# Altium PCB esp32.PcbDoc (part 1 of 2)
Units mil, origin at the board's own origin, x right, y up, seen from the top; angles counter-clockwise.
Board outline 804.97 x 1919.97 mil, 4 copper layers (Top Layer, VCC, GND, Bottom Layer), stack 51.1 mil thick; 76 components, 91 nets, 311 pads, 308 vias.
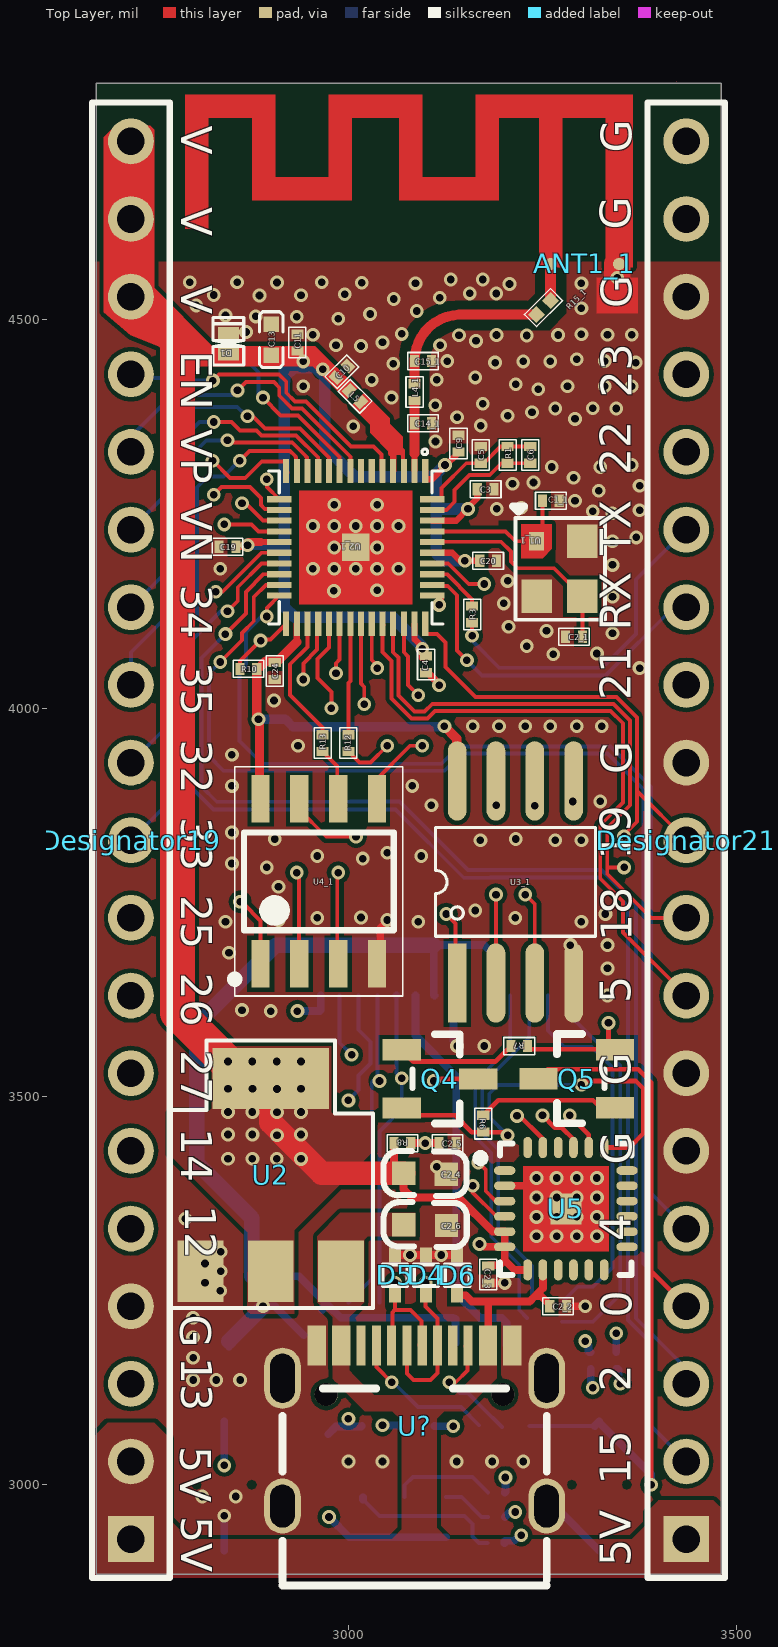
[diagram p0: Top Layer view]
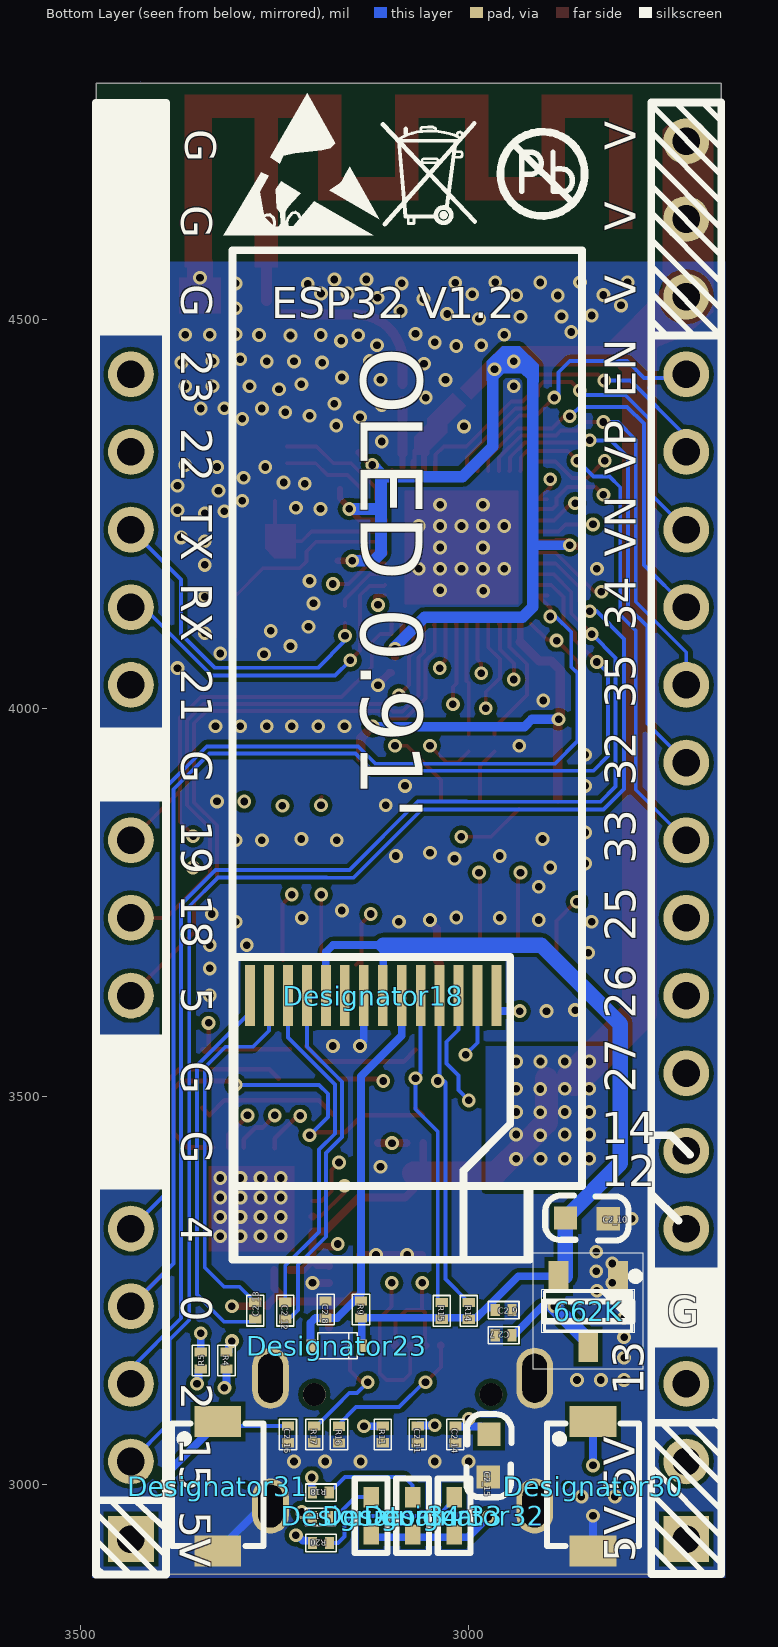
[diagram p1: Bottom Layer view, seen from below]
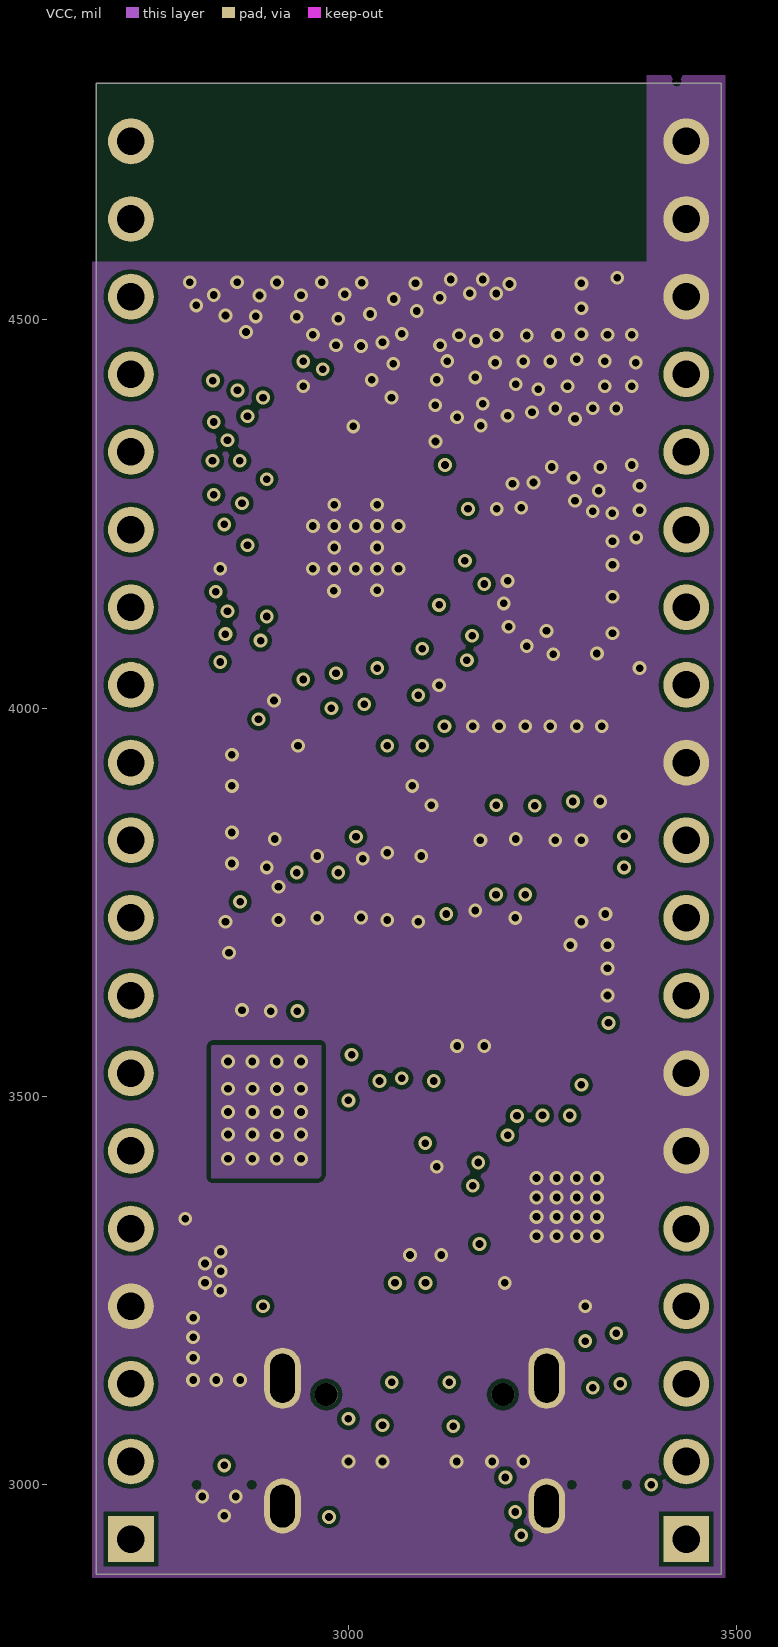
[diagram p2: VCC]
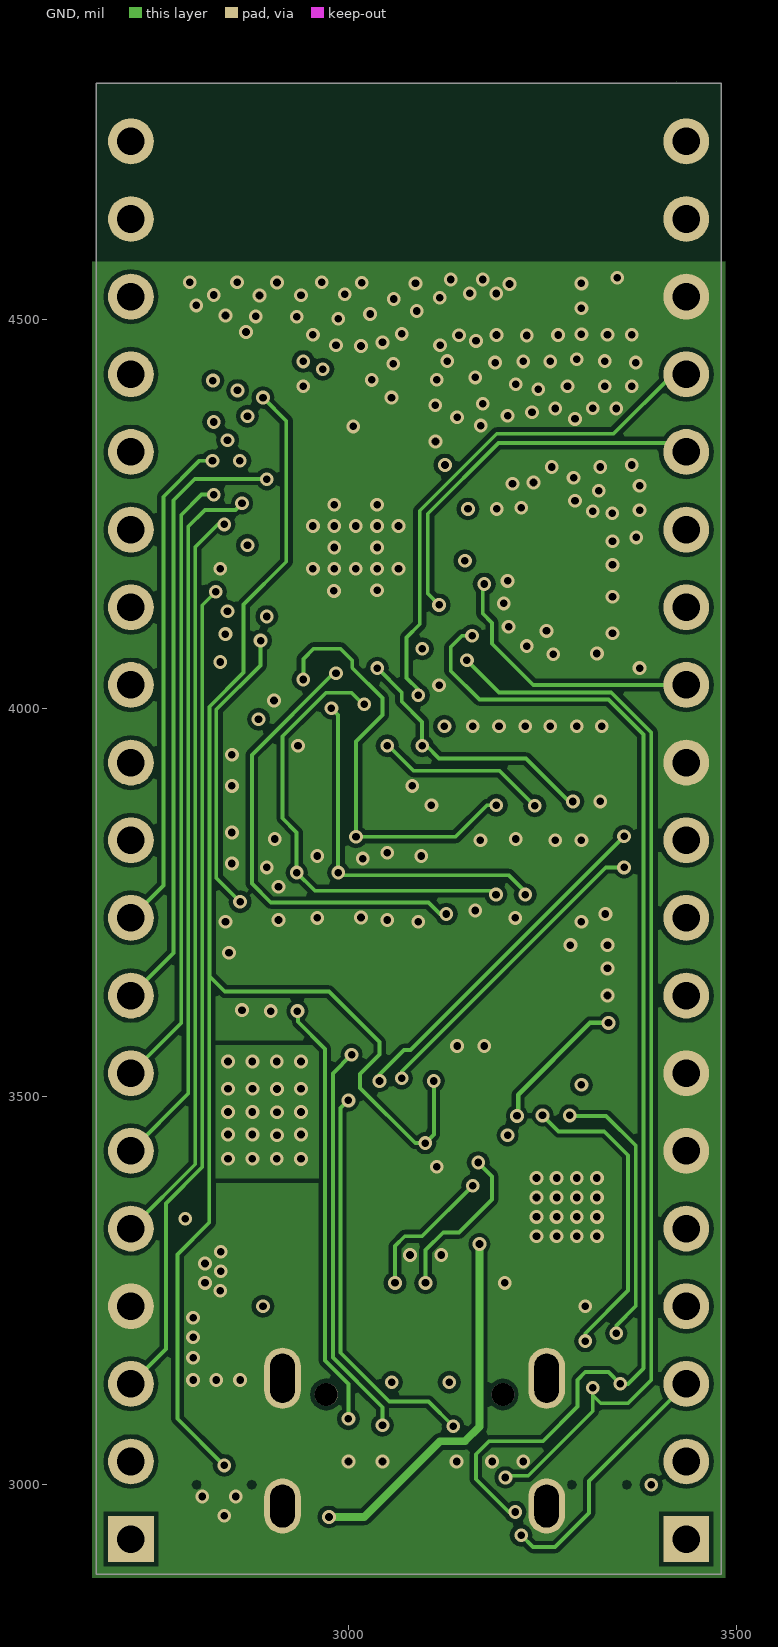
[diagram p3: GND]

## Layer stack, top to bottom
Top Solder: solder mask 0.4, Solder Resist, Dk 3.5
Top Layer: signal copper 1.3778
Dielectric 2: prepreg 4.2, PP-014, Dk 4.2
VCC: signal copper 0.4724
Dielectric 1: core 39, Core-042, Dk 4.6
GND: signal copper 0.4724
Dielectric 3: prepreg 4.2, PP-014, Dk 4.2
Bottom Layer: signal copper 1.3778
Bottom Solder: solder mask 0.4, Solder Resist, Dk 3.5

## Board outline
2675.01,2885.01 2675.01,4804.98 3479.99,4804.98 3479.99,2885.01

## Design rules (kind name [scope] priority, off if disabled: settings)
Clearance [All] p1: gap=5.5 ignorepadtopadclearanceinfootprint=FALSE except(4: Arc-Arc Arc-Track Track-Track)
ComponentClearance [All] p1: gap=0 collisioncheckmode=3 verticalgap=0 showdistances=FALSE
DiffPairsRouting [All] p1: maxlimit=10 minlimit=4 mostfreqgap=10 toplayer_minwidth=4 toplayer_maxwidth=15 toplayer_prefwidth=15 midlayer1_minwidth=4 midlayer1_maxwidth=15 midlayer1_prefwidth=15 midlayer2_minwidth=4 midlayer2_maxwidth=15 midlayer2_prefwidth=15 bottomlayer_minwidth=4 bottomlayer_maxwidth=15 bottomlayer_prefwidth=15 maxuncoupledlength=500
HoleSize [All] p1: absolutevalues=TRUE maxlimit=248.03 minlimit=7.87 maxpercent=80.000 minpercent=20.000
MinimumAnnularRing [All] p1: minimumring=4
PolygonConnect alll [All vs IsNamedPolygon('+5V_L01_P002') Or  IsNamedPolygon('GND-VDD33') Or  IsNamedPolygon('Top Layer-GND') Or  IsNamedPolygon('Bottom Layer-VDD33') Or  IsNamedPolygon('Top Layer-VDD33') Or  IsNamedPolygon('GND-GND') Or  IsNamedPolygon('VDD33_L02_P008') Or  IsNamedPolygon('Bottom Layer-GND') Or  IsNamedPolygon('VCC-GND')] p1: connectstyle=Direct reliefconductorwidth=10 reliefentries=4 polygonreliefangle="90 Angle" airgapwidth=10
PolygonConnect vdd3333 [All vs IsNamedPolygon('VDD33_L02_P008')] p2: connectstyle=Direct reliefconductorwidth=10 reliefentries=4 polygonreliefangle="90 Angle" airgapwidth=10
PolygonConnect all [All vs IsNamedPolygon('Top Layer-VDD33') Or  IsNamedPolygon('+5V_L01_P002') Or  IsNamedPolygon('Top Layer-GND') Or  IsNamedPolygon('Bottom Layer-VDD33') Or  IsNamedPolygon('VDD33_L02_P008') Or  IsNamedPolygon('VCC-GND') Or  IsNamedPolygon('GND-VDD33') Or  IsNamedPolygon('GND-GND') Or  IsNamedPolygon('Bottom Layer-GND')] p3: connectstyle=Direct reliefconductorwidth=10 reliefentries=4 polygonreliefangle="90 Angle" airgapwidth=10
PolygonConnect +5v_1 [All vs IsNamedPolygon('Bottom Layer-+5V')] p4: connectstyle=Direct reliefconductorwidth=10 reliefentries=4 polygonreliefangle="90 Angle" airgapwidth=10
PolygonConnect botton [All vs IsNamedPolygon('Bottom Layer-GND')] p5: thpad.connectstyle=Relief thpad.reliefconductorwidth=10 thpad.reliefentries=4 thpad.polygonreliefangle="90 Angle" thpad.airgapwidth=10 smdpad.connectstyle=Relief smdpad.reliefconductorwidth=10 smdpad.reliefentries=4 smdpad.polygonreliefangle="90 Angle" smdpad.airgapwidth=10 via.connectstyle=Direct via.reliefconductorwidth=10 via.reliefentries=4 via.polygonreliefangle="90 Angle" via.airgapwidth=10
PolygonConnect vdd_3 [All vs IsNamedPolygon('VDD33_L02_P008')] p6: thpad.connectstyle=Relief thpad.reliefconductorwidth=10 thpad.reliefentries=4 thpad.polygonreliefangle="90 Angle" thpad.airgapwidth=10 smdpad.connectstyle=Relief smdpad.reliefconductorwidth=10 smdpad.reliefentries=4 smdpad.polygonreliefangle="90 Angle" smdpad.airgapwidth=10 via.connectstyle=Direct via.reliefconductorwidth=10 via.reliefentries=4 via.polygonreliefangle="90 Angle" via.airgapwidth=10
PolygonConnect vdd_2 [All vs IsNamedPolygon('VDD33_L02_P018')] p7: thpad.connectstyle=Relief thpad.reliefconductorwidth=10 thpad.reliefentries=4 thpad.polygonreliefangle="90 Angle" thpad.airgapwidth=10 smdpad.connectstyle=Relief smdpad.reliefconductorwidth=10 smdpad.reliefentries=4 smdpad.polygonreliefangle="90 Angle" smdpad.airgapwidth=10 via.connectstyle=Direct via.reliefconductorwidth=10 via.reliefentries=4 via.polygonreliefangle="90 Angle" via.airgapwidth=10
PolygonConnect gndvdd33 [All vs IsNamedPolygon('VDD33_L02_P018')] p8: thpad.connectstyle=Relief thpad.reliefconductorwidth=10 thpad.reliefentries=4 thpad.polygonreliefangle="90 Angle" thpad.airgapwidth=10 smdpad.connectstyle=Relief smdpad.reliefconductorwidth=10 smdpad.reliefentries=4 smdpad.polygonreliefangle="90 Angle" smdpad.airgapwidth=10 via.connectstyle=Direct via.reliefconductorwidth=10 via.reliefentries=4 via.polygonreliefangle="90 Angle" via.airgapwidth=10
PolygonConnect "gnd ndd33" [All vs IsNamedPolygon('VDD33_L02_P018')] p9: thpad.connectstyle=Relief thpad.reliefconductorwidth=10 thpad.reliefentries=4 thpad.polygonreliefangle="90 Angle" thpad.airgapwidth=10 smdpad.connectstyle=Relief smdpad.reliefconductorwidth=10 smdpad.reliefentries=4 smdpad.polygonreliefangle="90 Angle" smdpad.airgapwidth=10 via.connectstyle=Direct via.reliefconductorwidth=10 via.reliefentries=4 via.polygonreliefangle="90 Angle" via.airgapwidth=10
PolygonConnect singnd [All vs IsNamedPolygon('GND-GND')] p10: thpad.connectstyle=Relief thpad.reliefconductorwidth=10 thpad.reliefentries=4 thpad.polygonreliefangle="90 Angle" thpad.airgapwidth=10 smdpad.connectstyle=Relief smdpad.reliefconductorwidth=10 smdpad.reliefentries=4 smdpad.polygonreliefangle="90 Angle" smdpad.airgapwidth=10 via.connectstyle=Direct via.reliefconductorwidth=10 via.reliefentries=4 via.polygonreliefangle="90 Angle" via.airgapwidth=10
PolygonConnect gnd [All vs IsNamedPolygon('VCC-GND')] p11: thpad.connectstyle=Relief thpad.reliefconductorwidth=10 thpad.reliefentries=4 thpad.polygonreliefangle="90 Angle" thpad.airgapwidth=10 smdpad.connectstyle=Relief smdpad.reliefconductorwidth=10 smdpad.reliefentries=4 smdpad.polygonreliefangle="90 Angle" smdpad.airgapwidth=10 via.connectstyle=Direct via.reliefconductorwidth=10 via.reliefentries=4 via.polygonreliefangle="90 Angle" via.airgapwidth=10
PolygonConnect vdd_1 [All vs IsNamedPolygon('Bottom Layer-VDD33')] p12: thpad.connectstyle=Relief thpad.reliefconductorwidth=10 thpad.reliefentries=4 thpad.polygonreliefangle="90 Angle" thpad.airgapwidth=10 smdpad.connectstyle=Relief smdpad.reliefconductorwidth=10 smdpad.reliefentries=4 smdpad.polygonreliefangle="90 Angle" smdpad.airgapwidth=10 via.connectstyle=Direct via.reliefconductorwidth=10 via.reliefentries=4 via.polygonreliefangle="90 Angle" via.airgapwidth=10
PolygonConnect topgnd [All vs IsNamedPolygon('Top Layer-GND')] p13: thpad.connectstyle=Relief thpad.reliefconductorwidth=10 thpad.reliefentries=4 thpad.polygonreliefangle="90 Angle" thpad.airgapwidth=10 smdpad.connectstyle=Relief smdpad.reliefconductorwidth=10 smdpad.reliefentries=4 smdpad.polygonreliefangle="90 Angle" smdpad.airgapwidth=10 via.connectstyle=Direct via.reliefconductorwidth=10 via.reliefentries=4 via.polygonreliefangle="90 Angle" via.airgapwidth=10
PolygonConnect vdd33 [All vs IsNamedPolygon('Top Layer-VDD33')] p14: connectstyle=Direct reliefconductorwidth=10 reliefentries=4 polygonreliefangle="90 Angle" airgapwidth=10
PolygonConnect +5v [All vs IsNamedPolygon('+5V_L01_P002')] p15: thpad.connectstyle=Direct thpad.reliefconductorwidth=10 thpad.reliefentries=4 thpad.polygonreliefangle="90 Angle" thpad.airgapwidth=10 smdpad.connectstyle=Direct smdpad.reliefconductorwidth=10 smdpad.reliefentries=4 smdpad.polygonreliefangle="90 Angle" smdpad.airgapwidth=10 via.connectstyle=Relief via.reliefconductorwidth=10 via.reliefentries=4 via.polygonreliefangle="90 Angle" via.airgapwidth=10
PolygonConnect asm_1 [All vs IsNamedPolygon('Top Layer-VDD33')] p16: thpad.connectstyle=Direct thpad.reliefconductorwidth=10 thpad.reliefentries=4 thpad.polygonreliefangle="90 Angle" thpad.airgapwidth=10 smdpad.connectstyle=Direct smdpad.reliefconductorwidth=10 smdpad.reliefentries=4 smdpad.polygonreliefangle="90 Angle" smdpad.airgapwidth=10 via.connectstyle=Relief via.reliefconductorwidth=10 via.reliefentries=4 via.polygonreliefangle="90 Angle" via.airgapwidth=10
PolygonConnect asm [All vs IsNamedPolygon('Top Layer-VDD33')] p17: connectstyle=Relief reliefconductorwidth=10 reliefentries=4 polygonreliefangle="90 Angle" airgapwidth=10
PolygonConnect [All] p18: connectstyle=Relief reliefconductorwidth=10 reliefentries=4 polygonreliefangle="90 Angle" airgapwidth=10
RoutingVias [All] p1: holewidth=28 width=50 viastyle="Through Hole" minholewidth=8 minwidth=17.72 maxholewidth=50 maxwidth=80
SolderMaskExpansion [All] p1: expansion=4
Width [All] p1: maxlimit=50 minlimit=4 preferedwidth=10
27 further rules are at their usual default settings.

## Components (designator, comment, footprint, x,y, rotation, side; value= is the part's Value field where it differs from the comment)
662K "SOT-23-3" SOT-23-3 2846.22,3223.35 r270 bottom
ANT1_1 "MINI_ANT_TYPEB" MINI_ANT_TYPEB 3260.56,4572.06 r0 top
C1_1 "C0201" C0201 3260.58,4267.06 r0 top
C2_1 "C0201" C0201 3290.56,4092.06 r180 top
C2_2 "100nf" C0201 3270,3230 r180 top
C2_3 "100nf" C0201 3180,3270.83 r90 top
C2_4 "4.7uf" 0603C 3126.31,3399.65 r180 top
C2_5 "1uf" C0201 3127.64,3440 r180 top
C2_6 "4.7uf" 0603C 3126.61,3333.65 r180 top
C2_7 "1uf" C0201 2955,3192.69 r180 bottom
C2_8 "1uf" C0201 3184.35,3225.71 r90 bottom
C2_9 "100nf" C0201 2955,3225 r0 bottom
C2_10 "4.7uf" 0603C 2820.35,3342.12 r0 bottom
C2_11 "2.2uf" C0201 3065.7,3065 r90 bottom
C2_12 "1uf" C0201 3236.4,3224.17 r90 bottom
C2_13 "1uf" C0201 3275,3224.17 r270 bottom
C2_14 "100nf" C0201 3017.22,3065 r90 bottom
C2_15 "4.7uf" 0603C 2975.35,3009.79 r90 bottom
C2_16 "2.2uf" C0201 3232.85,3065 r90 bottom
C3 "100pf" C0201 3176.81,4282.06 r0 top
C4 "0.1uf" C0201 3100,4056.56 r270 top
C5 "10nf/6,3v 10%" C0201 3170.56,4326.31 r90 top
C6 "3.3nf/6.3v 10%" C0201 3234.31,4326.31 r90 top
C9 "0.1uf" C0201 3141.81,4340.81 r90 top
C10 "0.1uf" C0201 2991.67,4433.31 r45 top
C11 "1uf" C0201 2934.31,4470.81 r90 top
C13 "10uf" C0402 2900.56,4474.56 r90 top
C14_1 "C0201" C0201 3096.01,4367.06 r180 top
C15_1 "C0201" C0201 3096.01,4447.06 r180 top
C19 "0.1uf" C0201 2844.31,4207.81 r180 top
C20 "1uf" C0201 3180,4190 r0 top
C24 "1uf" C0201 2905,4047.88 r270 top
D1 "LESD8D3.3CAT5G" SOD882 2845.56,4469.56 r90 top
D4 "SOD-523" SOD-523#1 3100,3270 r90 top
D5 "SOD-523" SOD-523#1 3060,3270 r90 top
D6 "SOD-523" SOD-523#1 3140,3270 r90 top
Designator18 "Comment" OLED0.91 3079.34,3939.72 r270 bottom
Designator19 "Comment" "Pin HDR1X19/2.54mm-S" 2720,2930 r90 top
Designator21 "Comment" "Pin HDR1X19/2.54mm-S" 3435,2930 r90 top
Designator23 "1N4148" SOD-523#2 3194.77,3195.91 r180 bottom
Designator30 "Comment" SMT_SW_PTS_820 2840,3000 r270 bottom
Designator31 "Comment" SMT_SW_PTS_820 3323.14,3000 r270 bottom
Designator32 "Comment" 0402R 3018.82,2936.08 r90 bottom
Designator33 "Comment" 0402R 3072.39,2936.08 r90 bottom
Designator34 "Comment" 0402R 3125.72,2936.08 r90 bottom
L4_1 "L0201" L0201 3085.18,4407.06 r90 top
L5 "2.0nH" L0201 3008.56,4401.65 r135 top
Q4 "S8050" SOT-23(SOT-23-3) 3117.87,3522.6 r270 top
Q5 "S8050" SOT-23(SOT-23-3) 3294.14,3523.03 r90 top (schematic designator Q4)
R1 "20k 5%" R0201 3205,4326.31 r90 top
R3 "499ohm" R0201 3159.31,4120.81 r270 top
R4 "33r" R0201 3312,3160 r90 bottom
R5 "33r" R0201 3345,3160 r270 bottom
R6 "33r" R0201 3173.76,3465 r90 top
R7 "33r" R0201 3220,3565 r0 top
R8 "10k" R0201 3069.51,3440 r0 top
R9 "4.7k" R0201 3138.79,3225.71 r90 bottom
R10 "10k" R0201 2871.17,4050.68 r180 top
R11 "560k" R0201 3110.8,3065 r90 bottom
R12 "0" R0201 3000,3955 r270 top
R13 "0" R0201 2966.81,3955 r270 top
R14 "4.7k" R0201 3000,3224.06 r90 bottom
R15 "4.7k" R0201 3034.69,3224.06 r90 bottom
R15_1 "R0201A" R0201A 3251.21,4515.91 r45 top
R16 "5.1k" R0201 3167.07,3064.59 r90 bottom
R17 "5.1k" R0201 3198.96,3065 r90 bottom
R18 "4.7k" R0201 3190.43,2990 r180 bottom
R19 "4.7k" R0201 3190.71,2958.58 r180 bottom
R20 "4.7k" R0201 3190.33,2925 r180 bottom
U1_1 "3225" 3225 3242.31,4215.08 r270 top
U2 "SOT-223" SOT-223 2900,3275 r0 top
U2_1 "QFN48EB_0P35_5" QFN48EB_0P35_5 3009.39,4207.06 r270 top
U3_1 "SOIC08-WN" SOIC08-WN 3215,3776.31 r0 top
U4_1 "SOIC-8P" SOIC-8P 2961.87,3777.06 r90 top
U5 "CP2104-F03-GM" QFN-24_L4.0-W4.0-P0.50-BL-EP2.8 3280,3355.5 r270 top
U? "USB-C_SMD-TYPE-C-31-M-12" USB-C_SMD-TYPE-C-31-M-12 3085.18,3035 r0 top

## Footprints (in the part's own frame and the unit in brackets; to place one, negate y for a bottom-side part, rotate by r counter-clockwise, add the part's x,y. Pads: shape width x height; smd on the part's side, far side on the other; paste and mask are expansions set on the pad)
0402R [mil]
  rect 26x20 smd: 1(0,0) 2(48,0)
  silkscreen extent -24,-21 72,21, body extent 4,-10 43,10, height 13
0603C [mil]
  rect 30x30 smd: 1(0.21,-0.35) 2(55.21,-1.35)
  silkscreen extent -26,-30 81,28, body extent -1,-15 62,17, height 12
3225 [mm]
  rect 0.6x0.5 smd: 1(0,0)
  rect 1.1x1 smd: 2(1.8,0) 3(1.8,1.5) 4(0,1.5)
  Top Layer region: -0.55,0.5 -0.55,-0.5 0.55,-0.5 0.55,0.2 0.25,0.5 -0.55,0.5
  silkscreen extent -1.14,-0.77 2.57,2.23
C0201 [mm]
  rect 0.3x0.4 smd: 1(-0.275,0) 2(0.275,0)
  silkscreen extent -0.5,-0.28 0.5,0.28
C0402 [mil]
  rect 20x20 smd: 1(-20,0) 2(20,0)
  silkscreen extent -36,-15 36,15
L0201 [mm]
  rect 0.3x0.4 smd: 1(-0.275,0) 2(0.275,0)
  silkscreen extent -0.5,-0.28 0.5,0.28
MINI_ANT_TYPEB [mm]
  round 0.4 smd paste-0.2: 1(0,0) 2(2.237,0)
  Top Layer region: -0.377,-0.114 0.377,-0.114 0.377,4.786 1.796,4.786 1.796,-0.114 2.677,-0.114 2.677,5.54 -2.45,5.54 -2.45,2.84 -4.207,2.84 -4.207,5.54 -7.261,5.54 -7.261,2.84 -9.007,2.84 -9.007,5.54 -11.961,5.54 -11.961,1.161 -11.207,1.161 -11.207,4.786 -9.761,4.786 -9.761,2.086 -6.507,2.086 -6.507,4.786 -4.961,4.786 -4.961,2.086 -1.696,2.086 -1.696,4.786 -0.377,4.786 -0.377,-0.114
OLED0.91 [mm]
  rect 2x0.32 smd: 1(7.867,-5.139) 2(7.867,-4.519) 3(7.867,-3.899) 4(7.867,-3.279) 5(7.867,-2.659) 6(7.867,-2.039) 7(7.867,-1.419) 8(7.867,-0.799) 9(7.867,-0.179) 10(7.867,0.441) 11(7.867,1.061) 12(7.867,1.681) 13(7.867,2.301) 14(7.867,2.921)
  silkscreen extent -16.51,-5.72 16.51,5.72
"Pin HDR1X19/2.54mm-S" [mm] "Connector; Header; 19 Position"
  rect 1.5x1.5 hole 0.9: 1(0,0)
  round 1.5 hole 0.9: 2(2.54,0) 3(5.08,0) 4(7.62,0) 5(10.16,0) 6(12.7,0) 7(15.24,0) 8(17.78,0) 9(20.32,0) 10(22.86,0) 11(25.4,0) 12(27.94,0) 13(30.48,0) 14(33.02,0) 15(35.56,0) 16(38.1,0) 17(40.64,0) 18(43.18,0) 19(45.72,0)
  silkscreen extent -1.27,-1.27 46.99,1.27, body extent -1.27,-1.27 46.99,1.27, height 7.58
QFN48EB_0P35_5 [mm]
  rect 0.8x0.2 smd: 1(-2.5,2.275) 2(-2.5,1.925) 3(-2.5,1.575) 4(-2.5,1.225) 5(-2.5,0.875) 6(-2.5,0.525) 7(-2.5,0.175) 8(-2.5,-0.175) 9(-2.5,-0.525) 10(-2.5,-0.875) 11(-2.5,-1.225) 12(-2.5,-1.575) 13(-2.5,-1.925) 14(-2.5,-2.275) 25(2.5,-2.275) 26(2.5,-1.925) 27(2.5,-1.575) 28(2.5,-1.225) 29(2.5,-0.875) 30(2.5,-0.525) 31(2.5,-0.175) 32(2.5,0.175) 33(2.5,0.525) 34(2.5,0.875) 35(2.5,1.225) 36(2.5,1.575) 37(2.5,1.925) 38(2.5,2.275)
  rect 0.2x0.8 smd: 15(-1.575,-2.5) 16(-1.225,-2.5) 17(-0.875,-2.5) 18(-0.525,-2.5) 19(-0.175,-2.5) 20(0.175,-2.5) 21(0.525,-2.5) 22(0.875,-2.5) 23(1.225,-2.5) 24(1.575,-2.5) 39(1.575,2.5) 40(1.225,2.5) 41(0.875,2.5) 42(0.525,2.5) 43(0.175,2.5) 44(-0.175,2.5) 45(-0.525,2.5) 46(-0.875,2.5) 47(-1.225,2.5) 48(-1.575,2.5)
  rect 0.9x0.9 smd: 49(0,0)
  Top Layer region: -1.85,1.85 1.85,1.85 1.85,-1.85 -1.85,-1.85
  Top Layer region: -1.845,-0.95 -0.945,-0.95 -0.945,-1.85 -1.845,-1.85 -1.845,-0.95
  Top Layer region: 0.955,-0.95 1.85,-0.95 1.85,-1.85 0.955,-1.85 0.955,-0.95
  Top Layer region: -1.85,0.45 -0.95,0.45 -0.95,-0.45 -1.85,-0.45 -1.85,0.45
  Top Layer region: -1.85,1.85 -0.945,1.85 -0.945,0.945 -1.85,0.945 -1.85,1.85
  Top Layer region: -0.445,1.85 0.455,1.85 0.455,0.945 -0.445,0.945 -0.445,1.85
  Top Layer region: 0.955,1.85 1.85,1.85 1.85,0.945 0.955,0.945 0.955,1.85
  Top Layer region: 0.95,0.45 1.85,0.45 1.85,-0.45 0.95,-0.45 0.95,0.45
  silkscreen extent -3.22,-2.85 2.5,2.85
QFN-24_L4.0-W4.0-P0.50-BL-EP2.8 [mm]
  oval 0.28x0.696 smd: 1(-1.25,-2) 2(-0.75,-2) 3(-0.25,-2) 4(0.25,-2) 5(0.75,-2) 6(1.25,-2) 13(1.25,2) 14(0.75,2) 15(0.25,2) 16(-0.25,2) 17(-0.75,2) 18(-1.25,2)
  oval 0.696x0.28 smd: 7(2,-1.25) 8(2,-0.75) 9(2,-0.25) 10(2,0.25) 11(2,0.75) 12(2,1.25) 19(-2,1.25) 20(-2,0.75) 21(-2,0.25) 22(-2,-0.25) 23(-2,-0.75) 24(-2,-1.25)
  rect 1.016x1.016 smd: 25(0.013,0)
  Top Layer region: -1.397,1.397 1.397,1.397 1.397,-1.397 -1.397,-1.397
  silkscreen extent -2.14,-3.05 2.16,2.15
R0201 [mm]
  rect 0.3x0.4 smd: 1(-0.275,0) 2(0.275,0)
  silkscreen extent -0.5,-0.28 0.5,0.28
R0201A [mm]
  rrect0% 0.4x0.4 smd: 1(-0.325,0) 2(0.325,0)
  silkscreen extent -0.6,-0.28 0.6,0.28
SMT_SW_PTS_820 [mil]
  rect 40x60 smd: A(-81.69,0) B(85,0)
  round 0.5 all layers, no hole: MH1(0,-35.43) MH2(0,35.43)
  silkscreen extent -79,-59 79,59
SOD882 [mm]
  rect 0.4x0.7 smd: 1(-0.35,0) 2(0.35,0)
  silkscreen extent -0.7,-0.5 0.85,0.5
SOD-523#1 [mm]
  rect 0.48x0.4 smd: 1(-0.66,0) 2(0.66,0)
  silkscreen extent -0.35,-0.4 0.35,0.4
SOD-523#2 [mm] "塑封二极管"
  rect 0.3x0.4 smd: A(-0.203,-0.425) K(1.473,-0.425)
  silkscreen extent 0,-0.85 1.3,0, body extent -0.16,-0.83 1.44,-0.03, height 0.65
SOIC08-WN [mil]
  rect 24x102.25 smd: 1(-75,-130.13)
  oval 24x102.25 smd: 2(-25,-130.13) 3(25,-130.13) 4(75,-130.13) 5(75,130.13) 6(25,130.13) 7(-25,130.13) 8(-75,130.13)
  silkscreen extent -103,-70 103,70
SOIC-8P [mm]
  rect 1.55x0.6 smd: 1(-2.7,1.905) 2(-2.7,0.635) 3(-2.7,-0.635) 4(-2.7,-1.905) 5(2.7,-1.905) 6(2.7,-0.635) 7(2.7,0.635) 8(2.7,1.905)
  silkscreen extent -3.75,-2.75 3.75,2.87
SOT-23(SOT-23-3) [mm]
  rect 0.7x1.25 smd: 1(-0.95,-1.25) 2(0.95,-1.25) 3(0,1.25)
  silkscreen extent -1.46,-0.9 1.46,0.65
SOT-23-3 [mm]
  rect 1x0.65 smd: 1(-1.15,0.97) 2(-1.15,-0.97) 3(1.15,0)
  silkscreen extent -1.9,-1.8 1.9,1.8
SOT-223 [mm]
  rect 1.5x2 smd: 1(-2.3,0) 2(0,0) 3(2.3,0)
  rect 3.8x2 smd: 4(0,6.3)
  silkscreen extent -3.35,-1.2 3.35,7.55
USB-C_SMD-TYPE-C-31-M-12 [mm]
  oval 1.2x1.8 hole 0.8 slot 1.4 at 90 deg: 0(-4.32,-1.584) 0(4.32,-1.584)
  oval 1.2x2 hole 0.8 slot 1.6 at 90 deg: 0(-4.32,2.596) 0(4.32,2.596)
  rect 0.3x1.3 smd: A1(-3.35,3.663) A4(-2.55,3.663) A5(-1.25,3.663) A6(-0.25,3.663) A7(0.25,3.663) A8(1.25,3.664) A9(2.55,3.663) A12(3.35,3.663) B1(3.05,3.663) B4(2.25,3.663) B5(1.75,3.663) B6(0.75,3.663) B7(-0.75,3.663) B8(-1.75,3.664) B9(-2.25,3.663) B12(-3.05,3.663)
  round 0.75 hole 0.75 unplated: ""(-2.89,2.066) ""(2.89,2.066)
  silkscreen extent -4.32,-4.19 4.32,2.26

## Via types
v1: diameter 17.72, hole 9.84, Top Layer to Bottom Layer, tented both sides, 308 vias

## Nets (pads, with @x,y where several pads share a name; then routed paths per layer and width w, separated by ;. In a path a pad name is that pad's centre, name@x,y a point inside that pad or via, vN(x,y) a via of type N, cw(c..) or ccw(c..) an arc to the next point about the centre after c; other vN are vias at no path point)
+5V: C2_2.2 C2_6.2 D6.1 Designator19.1 Designator19.2 Designator21.1 U2.3 U5.8 U?.A4 U?.A9 U?.B4 U?.B9 | length 204.2
  Top Layer w10: D6.1@3140,3244.02 3150.98,3244.02 3158.99,3236.01 3158.89,3235.9 3233.21,3235.9 3240,3242.69 ; U?.B4@3173.76,3179.22 U?.B4@3174.67,3180.12 ; U?.A9@3180,3202.48 3180,3235 ; U5.8@3250.47,3276.76 3250.47,3253.16 3240,3242.69 ; C2_2.2@3259.17,3230 3259.17,3231.97 3248.45,3242.69 3240,3242.69
ACTIVE: 
ANT1: ANT1_1.1 R15_1.2 | length 47.1
  Top Layer w14: R15_1.2@3260.25,4524.95 ANT1_1.1@3260.26,4572.06
ANT2: 
CC1: R16.2 U?.A5 | length 190.9
  Top Layer w5: U?.A5@3035.97,3179.21 3035.97,3151.74 v1(3055.7,3132.02)
  Bottom Layer w5: v1@3057.78,3132.02 3089.8,3100 3145,3100 R16.2@3168.33,3076.67
  Bottom Layer w10: v1(3055.7,3132.02) v1@3057.78,3132.02
CC2: R17.2 U?.B5 | length 153.5
  Top Layer w5: v1(3130,3132.02) 3138.27,3132.02 3153.18,3146.93 U?.B5@3153.18,3178.31
  Top Layer w10: U?.B5@3153.18,3178.31 U?.B5@3154.08,3179.21
  Bottom Layer w5: v1(3130,3132.02) 3143.9,3118.12 3153.95,3118.12 3171.7,3100.38 R17.2@3197.61,3074.47
CTS: 
D_N: 
D_P: 
Dc1n: C2_12.1 Designator18.4 | length 461.2
  Bottom Layer w5: Designator18.4@3208.44,3630 3208.44,3564.06 3163.39,3519.02 3163.39,3448.03 3183.93,3427.49 3183.93,3319.44 3220,3283.37 3220,3225 C2_12.1@3230,3215
Dc1p: C2_12.2 Designator18.3 | length 446.6
  Bottom Layer w5: Designator18.3@3232.85,3630 3232.85,3575.75 3172.39,3515.29 3172.39,3452.11 3192.93,3431.57 3192.93,3325.5 3236.4,3282.03 C2_12.2@3236.4,3235
Dc2n: C2_13.1 Designator18.2 | length 488.6
  Bottom Layer w5: Designator18.2@3257.26,3630 3257.26,3584.74 3277.94,3564.06 3313.21,3564.06 3340,3537.27 3340,3280 3315,3255 3295,3255 C2_13.1@3275,3235
Dc2p: C2_13.2 Designator18.1 | length 502.8
  Bottom Layer w5: C2_13.2@3275,3210 3315,3210 3350,3245 3350,3540 3281.66,3608.34 Designator18.1@3281.66,3630
DCD: 
Diref: Designator18.12 R11.2 | length 690.9
  GND w5: v1(3000,3495) 2990,3485 2990,3170 3052.65,3107.35 3103.06,3107.35 v1(3135,3075.41)
  Bottom Layer w5: v1(3000,3495) 3013.16,3508.16 3013.16,3527.05 3028.57,3542.46 3028.57,3570.55 3013.16,3585.96 Designator18.12@3013.16,3630
  Bottom Layer w10: R11.2@3110.8,3075.83 3111.21,3075.41 v1(3135,3075.41)
Dres: C2_8.1 Designator18.9 Designator23.A R9.2 | length 514.9
  Bottom Layer w10: Designator18.9@3086.39,3630 3086.39,3578.61 3138.78,3526.22 3138.78,3245.93 3146.19,3238.51 3146.19,3238.2 3169.52,3214.88 C2_8.1@3184.35,3214.88 3197.43,3214.88 3203.67,3208.64 Designator23.A@3203.67,3180.08
Dscl: 
Dsda: 
DSR: 
DTR: 
Dvbat: 
Dvbref: Designator18.6
Dvcc: C2_14.2 C2_15.2 Designator18.14 | length 660.5
  GND w5: v1(2934.31,3610) 2935,3610.69 2935,3596.25 2970,3561.25 2970,3160 3000,3130 v1(3000,3085)
  Bottom Layer w10: v1(2934.31,3610) 2963.04,3610 2964.34,3611.3 Designator18.14@2964.34,3630 ; C2_15.2@2974,3065 2984,3075 3000,3075 ; v1(3000,3085) 3000.2,3084.8 3000.2,3075 3016.4,3075 C2_14.2@3017.22,3075.83
Dvcomh: C2_11.2 Designator18.13 | length 618.3
  GND w5: v1(3004.12,3553.89) 2980,3529.77 2980,3163.67 3043.84,3099.84 v1(3043.84,3076.69)
  Bottom Layer w5: Designator18.13@2988.75,3630 2988.75,3569.26 v1(3004.12,3553.89)
  Bottom Layer w10: v1(3043.84,3076.69) 3044.27,3076.26 3065.27,3076.26 C2_11.2@3065.7,3075.83
Dvdd: 662K.2 C2_9.2 C2_10.2 Designator18.5 Designator18.8 Designator23.K R9.1 R14.1 R15.1 | length 1217.9
  Bottom Layer w10: 662K.2@2884.41,3268.63 2936.37,3268.63 2975,3230 ; C2_9.2@2965.83,3225 2965.83,3226.97 2966.73,3227.87 2972.87,3227.87 2975,3230 ; Designator18.8@3110.8,3630 3110,3630.8 3110,3695 3175,3695 3184.03,3685.97 Designator18.5@3184.03,3630 ; R9.1@3135,3215 3034.69,3215 3000,3215 2990,3215 2975,3230 ; Designator23.K@3136.77,3181.14 3137.92,3182.29 R9.1@3137.92,3213.35
  Bottom Layer w20: 662K.2@2875.56,3268.63 C2_10.2@2875.56,3343.48 2805,3414.04 2805,3593.19 2906.81,3695 3110,3695
Dvss: 
EN: C2_5.2 Designator19.16 Designator30.A Q4.3 R8.2 U2_1.9 | length 2542
  Top Layer w5: v1(2890,4400) 2912.8,4377.2 2934.97,4377.2 2988.72,4323.45 U2_1.9@2988.72,4305.48
  Top Layer w6: v1@3110,3522.6 Q4.3@3167.07,3522.6
  Top Layer w10: R8.2@3080.34,3440 v1(3098.96,3440) C2_5.2@3116.81,3440
  GND w5: Designator19.16@2714.31,4413.96 2720.71,4407.56 Designator19.16@2743.15,4430 ; v1(2840,3025) 2780,3085 2780,3296.73 2820.81,3337.54 2820.81,3654.79 2820.88,3654.86 ; v1(2890,4400) 2920,4370 2920,4188.66 2865,4133.66 2865,4046.04 2820.88,4001.92 2820.88,3654.86 ; v1(3110,3520) 3110,3451.04 v1(3098.96,3440) 3086.11,3440 3015,3511.11 3015,3528.89 3040,3553.89 3040,3570 2975,3635 2840.74,3635 2820.88,3654.86
  Bottom Layer w5: Designator19.16@2724.53,4425.47 2774.47,4425.47 2795.98,4446.98 2869.93,4446.98 2884.31,4432.6 v1@2884.31,4403.31 ; v1@2889.53,4400 v1(2890,4400)
  Bottom Layer w10: Designator19.16@2720,4430 Designator19.16@2724.53,4425.47 ; v1(2840,3025) Designator30.A@2840,3081.69
FLASH_CLK: R12.2 U3_1.6 | length 286.9
  Top Layer w5: R12.2@3000,3944.17 3014.17,3930 3028.35,3930 v1(3050,3951.65)
  GND w5: v1(3050,3951.65) 3051.64,3951.65 3083.74,3919.56 3194.77,3919.56 v1(3240,3874.33)
GND: 662K.1 ANT1_1.2 C1_1.2 C2_1.2 C2_2.1 C2_3.1 C2_4.1 C2_5.1 C2_6.1 C2_7.1 C2_8.2 C2_9.1 C2_10.1 C2_11.1 C2_14.1 C2_15.1 C2_16.1 C3.2 C4.2 C5.2 C9.2 C10.2 C11.2 C13.2 C14_1.1 C15_1.1 C19.2 C20.2 C24.2 D1.2 D4.2 D5.2 D6.2 Designator18.7 Designator19.4 Designator21.6 Designator21.7 Designator21.11 Designator21.17 Designator21.18 Designator21.19 Designator30.B Designator31.B R11.1 R16.1 R17.1 U1_1.2 U1_1.4 U2.1 U2_1.49 U3_1.4 U4_1.4 U5.2 U5.25 U?.0 U?.A1 U?.A12 U?.B1 U?.B12 | length 524.3
  Top Layer w10: U4_1.4@3036.87,3670.76 3041.05,3674.93 3041.05,3716.27 3050,3725.22 v1(3050,3727.31) ; D5.2@3060,3295.98 D4.2@3100,3295.98 D6.2@3140,3295.98 ; C4.2@3100,4045.73 3101.97,4045.73 3116.81,4030.89 v1(3116.81,4029.56) ; C2_3.1@3180,3260 v1(3201.26,3260) ; U5.2@3201.26,3385.03 3249.98,3385.02 U5.25@3280,3355 ; C2_2.1@3280.83,3230 3281.02,3229.81 v1(3305,3229.81)
  Top Layer w34: v1(3346.08,4554.5) ANT1_1.2@3346.08,4572.06
  Bottom Layer w10: Designator30.B@2840,2915 v1(2840,2960) ; Designator18.7@3135.21,3630 3135.21,3571.88 3140,3567.09 v1(3140,3565) ; U?.0@3255.26,2972.62 3265.52,2972.62 Designator31.B@3323.14,2915
  other v1: 2811.81,2985 2855,2985 3000.2,3030 3043.84,3030 3139.31,3030 3185,3030 3225,3030 2800,3135 2829.88,3135 2860.56,3135 2800,3163.67 2800,3190 2800,3215 2835,3250 2815.29,3260 2835.69,3275 2815.29,3285 3079.4,3295.98 3119.42,3295.98 2835.69,3300 3242.16,3320 3268.11,3320 3294.05,3320 3320,3320 2790,3342.48 3242.16,3345 3268.11,3345 3294.05,3345 3320,3345 3242.16,3370 3268.11,3370 3294.05,3370 3320,3370 3242.16,3395 3268.11,3395 3294.05,3395 3320,3395 3113.69,3409.4 3175,3565 2900,3610 2863.06,3611.3 3333.7,3630 3333.7,3665 2846.22,3685 3285.86,3695 3333.7,3695 2841.81,3725 3090,3725 3300,3725 2910,3727.31 2960,3730 3016.21,3730.48 3215,3730 3330.95,3735 3163.39,3739.5 2910,3770 2895,3795 2850,3800 3018.33,3806.37 2960,3809.66 3093.81,3809.66 3050,3813.96 3170,3830 3266.39,3830 3300,3830 2905,3831.65 3215.56,3831.65 2850,3840 3106.84,3875 3324.31,3880 2850,3900 3082.14,3900 2850,3940 2935,3951.65 3160,3976.65 3193.94,3976.65 3227.87,3976.65 3260,3976.65 3294.14,3976.65 3326.21,3976.65 2904.16,4010 3375,4051.65 3263.68,4069.56 3320,4070.41 3229.56,4080 3340,4096.65 3255,4099.56 3206.31,4105 3200,4135 3340,4143.66 2981.31,4151.06 3036.95,4151.94 3205,4163.96 2835,4179.5 2954.27,4179.5 2981.83,4179.5 3009.39,4179.5 3036.95,4179.5 3064.51,4179.5 3340,4184.56 2981.83,4207.06 3036.95,4207.06 3340,4215.08 3370.56,4220 2954.27,4234.62 2981.83,4234.62 3009.39,4234.62 3036.95,4234.62 3064.51,4234.62 3339.81,4251.06 3314.69,4253.56 3375,4255 3190.97,4256.65 3222.62,4258.06 2981.83,4262.18 3036.95,4262.18 3291.81,4267.06 3322.31,4280.06 3375,4286.65 3211.31,4289.06 3238.43,4290.76 3290,4296.65 3261.99,4310.71 3324.31,4310.71 3365,4313.31 3112.11,4343.56 3006.11,4362.96 3170.56,4363.96 3291.81,4372.56 3140,4374.65 3205,4376.65 3236.4,4381.06 3266.39,4386.06 3314.69,4386.44 3345,4386.06 3111.94,4390.05 3173.06,4392.06 3055.56,4400 3244.31,4410.81 2942,4414.66 3282.21,4414.66 3330,4414.66 3365,4414.66 3215.56,4417.06 3030.06,4422.83 3113.69,4422.97 3163.39,4426.06 3057.62,4443.54 3188.86,4445.11 3370,4445.11 3127.39,4446.98 3225,4446.65 3260,4446.65 3330,4446.98 3294.14,4449.24 3016.21,4466.43 2984.02,4467.36 3118.11,4467.36 3043.84,4471.1 3164.39,4473.06 3142.38,4480.35 3229.56,4480 2954.31,4480.81 3190.71,4480.67 3270,4480.67 3333.7,4480.81 3365,4480.81 3068.67,4482.06 3300,4481.63 2868.06,4484.56 2986.81,4501.65 2933.39,4504.06 2880.56,4504.56 2841.81,4505.81 3027.9,4507.6 3087.93,4511.52 3300,4515 2804,4518.76 3058.39,4527.06 3117.59,4528.58 2885.46,4531.45 2826.63,4532.15 2939.03,4531.8 2995.38,4533.19 3156.19,4534.17 3190.33,4534.01 3207.39,4546.29 3086.39,4547.06 3300,4547.06 2908.07,4548.15 2965.81,4548.5 3017.29,4547.8 2795.67,4548.65 2856.66,4548.65 3131.81,4552.06 3173.06,4552.06
GPIO0: C2_16.2 Designator21.4 Designator31.A Q5.3 U2_1.23 | length 2492.5
  Top Layer w5: v1(2835,4059.53) 2863.06,4087.59 2863.06,4096.89 2878.14,4111.97 2878.14,4143.22 2893.75,4158.83 U2_1.23@2910.96,4158.83
  Top Layer w6: Q5.3@3244.94,3523.03 3256.91,3535 3373.03,3535 3390,3518.03 3390,3275 ; v1(3390,3000) 3390,3275 ; Designator21.4@3435,3230 3390,3275
  Bottom Layer w5: v1(2835,4059.53) 2820.56,4045.09 2820.56,3938.31 2839.31,3919.56 3123.73,3919.56 3146.11,3941.94 3333.7,3941.94 3380,3895.63 3380,3285 Designator21.4@3435,3230 ; C2_16.2@3232.85,3075.83 Designator31.A@3317.28,3075.83
  Bottom Layer w10: Designator31.A@3317.28,3075.83 Designator31.A@3322.31,3080.86 ; Designator31.A@3323.14,3081.69 Designator31.A@3322.31,3080.86 ; v1(3390,3000) 3390,3013.17 Designator31.A@3322.31,3080.86
GPIO2: Designator21.3 R20.1 U2_1.22 | length 1949.9
  Top Layer w5: v1(2841.57,4095.43) 2868.06,4121.92 2868.06,4149.92 2890.75,4172.61 U2_1.22@2910.96,4172.61
  GND w5: v1(3222.62,2935) 3237.62,2920 3266.21,2920 3310,2963.79 3310,3005 Designator21.3@3435,3130
  Bottom Layer w5: v1(2841.57,4095.43) 2810.9,4064.76 2810.9,3899.1 2830.44,3879.56 3002.74,3879.56 3002.9,3879.72 3065.7,3879.72 3153.76,3791.65 3326.07,3791.65 3370.56,3747.17 3370.56,3214.44 3435,3150 Designator21.3@3435,3130
  Bottom Layer w10: R20.1@3201.16,2925 3201.16,2926.97 3202.06,2927.87 3213.41,2927.87 3220.54,2935 v1(3222.62,2935)
GPIO4: Designator21.5 U2_1.24 | length 1385
  Top Layer w5: v1(2895,4118.22) 2895,4129.08 U2_1.24@2910.96,4145.05 U2_1.24@2898.61,4145.05
  Bottom Layer w5: v1(2895,4118.22) 2888.15,4118.22 2868.06,4098.13 2868.06,4053.31 2860,4045.25 2860,3957.62 2889.06,3928.56 3120,3928.56 3142.38,3950.94 3337.43,3950.94 3390,3898.36 3390,3375 Designator21.5@3435,3330
GPIO5: Designator21.8 U2_1.34 | length 831.1
  Top Layer w5: U2_1.34@3045.11,4107.36 U2_1.34@3043.84,4108.63 3043.84,4072.51 3055.56,4060.79 3055.56,4012.49 3081.4,3986.65 3101.64,3986.65 3111.64,3996.65 3337.74,3996.65 3353.73,3980.66 3353.73,3878.73 3324.31,3849.31 3324.31,3780.69 3353.73,3751.27 3353.73,3711.27 Designator21.8@3435,3630